# EAGLE board Wired_Mouse (EAGLE 9.6.0)
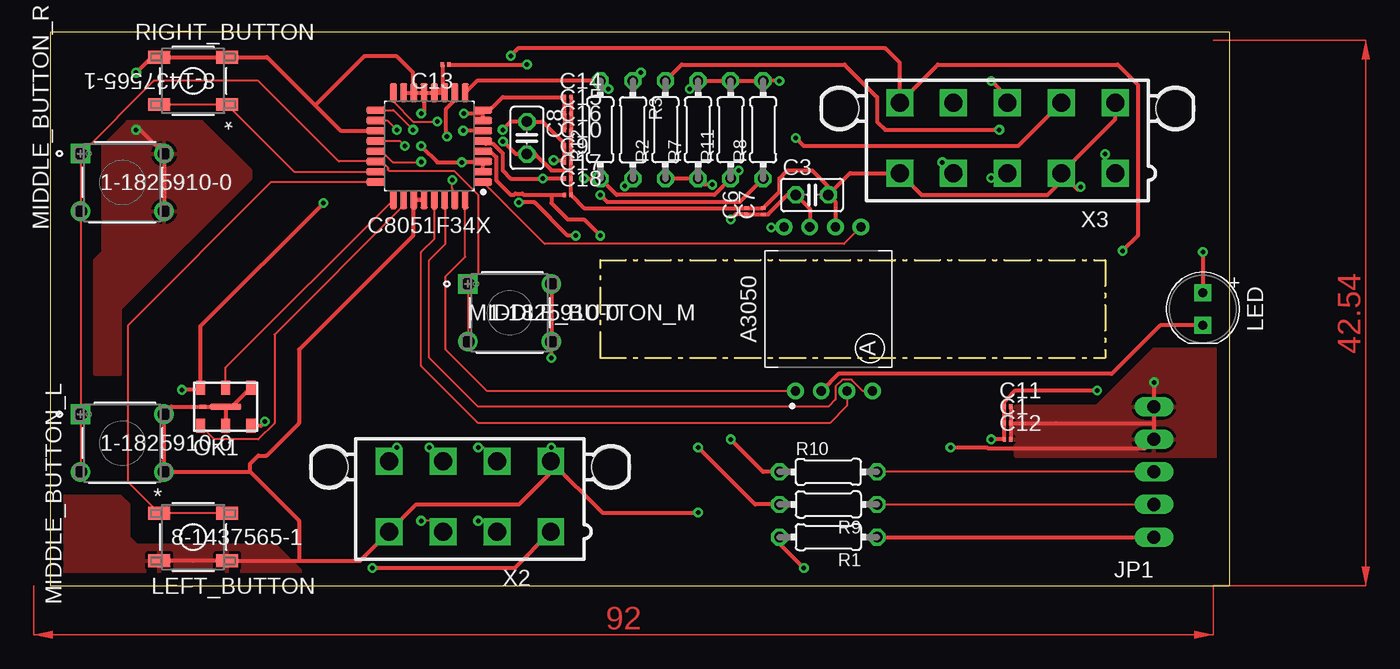
[diagram p0: board, top side]
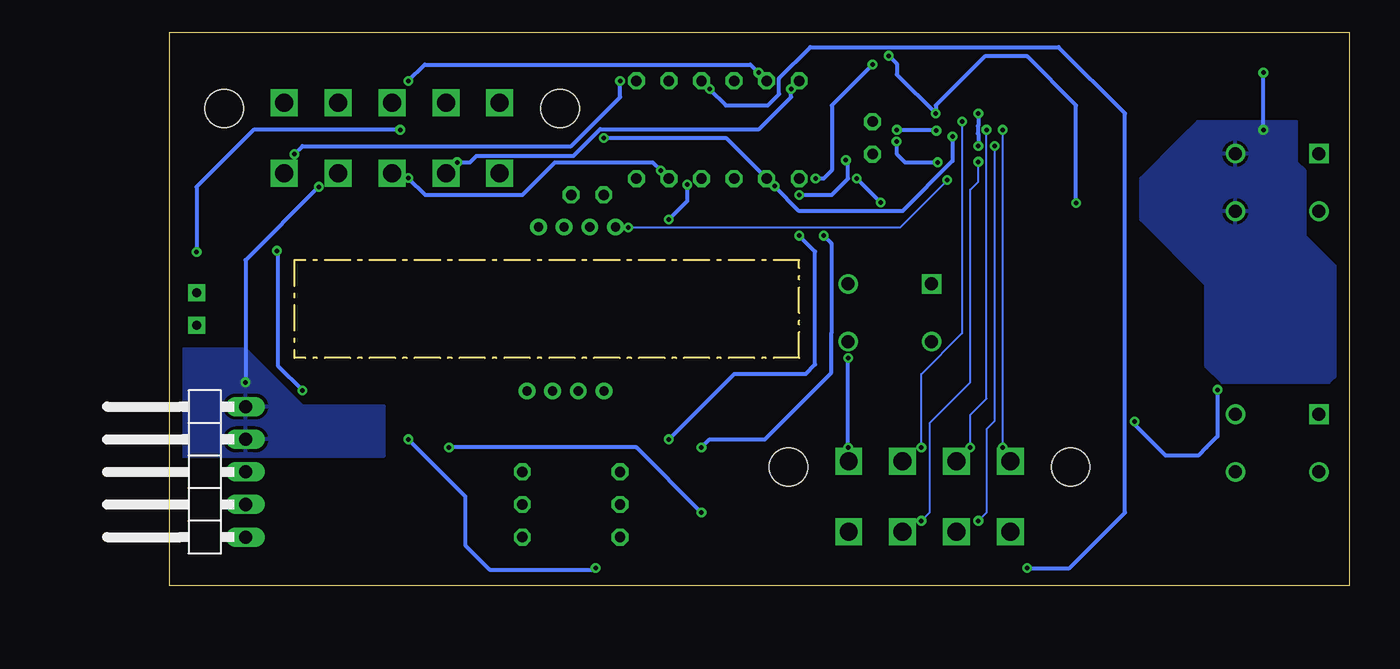
[diagram p1: board, bottom side, seen from below]

Size 92 x 43.17 mm. Coordinates in mm from the lower left corner, seen from the top.
Outline: 0,0 92,0 92,43.17 0,43.17 0,0
Outline: 42.91,17.78 42.91,25.4 82.28,25.4 82.28,17.78 42.91,17.78
Copper layers (1*16): Top 0.035mm / dielectric 1.5mm / Bottom 0.035mm
Design rules "default": minimum track width 6mil, minimum drill 0.35mm, track to track 6mil, track to pad 6mil, pad to pad 6mil, via to via 6mil, smd to smd 6mil, copper to edge 40mil, drill to drill 6mil, minimum pad ring 10mil, minimum via ring 8mil, stop-mask expansion 4mil, vias tented up to drill 0mil, thermal gap 10mil

## Footprints (pad centres in the part's own frame; a part is rotated, then mirrored left to right if it is on the bottom)
C0201 = smd 0.25 x 0.35: 1 -0.25,0; 2 0.25,0
C025-025X050 = drill 0.813 octagon: 1 -1.27,0; 2 1.27,0
1X05/90 = drill 1.016 long: 1 -5.08,-3.81; 2 -2.54,-3.81; 3 0,-3.81; 4 2.54,-3.81; 5 5.08,-3.81
SW4_1437565 = smd 1.702 x 0.991: 1 -2.642,1.85; 2 2.642,1.85; 3 -2.642,-1.85; 4 2.642,-1.85
SWITCH_1-1825910-0 = drill 1.016 pad 1.524 square: 1 -6.502,4.496 | drill 1.016 pad 1.524: 2 -6.502,0; 3 0,0; 4 0,4.496
AEDR-8300 = smd 0.72 x 1.08: 1 -1.96,-1.485; 2 0,-1.485; 3 1.96,-1.485; 4 1.96,1.485; 5 0,1.485; 6 -1.96,1.485 | smd 0.5 x 0.3: E1 -1.778,0 | smd 2.5 x 0.5: E2 0,0
0204/7 = drill 0.813 octagon: 1 -3.81,0; 2 3.81,0
DIP1279W50P200L985H450Q8B = drill 0.714 pad 1.314: 1 -6.395,2.55; 2 -6.395,0.55; 3 -6.395,-1.45; 4 -6.395,-3.45; 5 6.395,-2.55; 6 6.395,-0.55; 7 6.395,1.45; 8 6.395,3.45
QFP80P900X900X160-32N = smd 1.469 x 0.547: 1 -4.171,2.8; 2 -4.171,2; 3 -4.171,1.2; 4 -4.171,0.4; 5 -4.171,-0.4; 6 -4.171,-1.2; 7 -4.171,-2; 8 -4.171,-2.8; 17 4.171,-2.8; 18 4.171,-2; 19 4.171,-1.2; 20 4.171,-0.4; 21 4.171,0.4; 22 4.171,1.2; 23 4.171,2; 24 4.171,2.8 | smd 0.547 x 1.469: 9 -2.8,-4.171; 10 -2,-4.171; 11 -1.2,-4.171; 12 -0.4,-4.171; 13 0.4,-4.171; 14 1.2,-4.171; 15 2,-4.171; 16 2.8,-4.171; 25 2.8,4.171; 26 2,4.171; 27 1.2,4.171; 28 0.4,4.171; 29 -0.4,4.171; 30 -1.2,4.171; 31 -2,4.171; 32 -2.8,4.171
LEDRD254W50D500H871B = drill 0.7 pad 1.3 square: 1 -1.27,0; 2 1.27,0
5566-8 = drill 1.4 square: 1 6.3,-2.75; 2 2.1,-2.75; 3 -2.1,-2.75; 4 -6.3,-2.75; 5 6.3,2.75; 6 2.1,2.75; 7 -2.1,2.75; 8 -6.3,2.75 | hole 3: 11,2.29; -11,2.29
5566-10 = drill 1.4 square: 1 8.4,-2.75; 2 4.2,-2.75; 3 0,-2.75; 4 -4.2,-2.75; 5 -8.4,-2.75; 6 8.4,2.75; 7 4.2,2.75; 8 0,2.75; 9 -4.2,2.75; 10 -8.4,2.75 | hole 3: 13.1,2.29; -13.1,2.29

## Placement (x,y rotation side)
C1  [C0201]  74.66,12.7 0 top
C3  [C025-025X050]  59.42,30.48 0 top
C6  [C0201]  54.34,29.21 90 top
C7  [C0201]  55.61,29.21 90 top
C8  [C025-025X050]  37.2,34.92 270 top
C9  [C0201]  40.37,33.02 0 top
C10  [C0201]  40.37,34.29 0 top
C11  [C0201]  74.66,13.97 0 top
C12  [C0201]  74.66,11.43 0 top
C13  [C0201]  30.84,40.64 180 top
C14  [C0201]  40.37,38.1 0 top
C15  [C0201]  40.37,36.83 0 top
C16  [C0201]  40.37,35.56 0 top
C17  [C0201]  40.37,31.75 0 top
C18  [C0201]  40.37,30.48 0 top
JP1  [1X05/90]  89.9,8.89 90 bottom
LEFT_BUTTON  8-1437565-1  [SW4_1437565]  11.16,3.81 0 top
MIDDLE_BUTTON_L  1-1825910-0  [SWITCH_1-1825910-0]  8.89,8.89 0 top
MIDDLE_BUTTON_M  1-1825910-0  [SWITCH_1-1825910-0]  39.1,19.05 0 top
MIDDLE_BUTTON_R  1-1825910-0  [SWITCH_1-1825910-0]  8.89,29.21 0 top
OK1  AEDR-8300-K/P/Q  [AEDR-8300]  13.7,13.97 0 top
R1  [0204/7]  60.69,3.81 180 top
R2  [0204/7]  47.99,35.56 90 top
R3  [0204/7]  45.45,35.56 270 top
R7  [0204/7]  50.53,35.56 90 top
R8  [0204/7]  55.61,35.56 90 top
R9  [0204/7]  60.69,6.35 180 top
R10  [0204/7]  60.69,8.89 0 top
R11  [0204/7]  53.07,35.56 90 top
R12  [0204/7]  42.91,35.56 90 top
RIGHT_BUTTON  8-1437565-1  [SW4_1437565]  11.16,39.37 180 top
U$1  ADNS_3050THROUGH_HOLE  [DIP1279W50P200L985H450Q8B]  60.69,21.59 90 top
U$2  C8051F34XSURFACE-MOUNT  [QFP80P900X900X160-32N]  29.57,34.29 180 top
U$3  HLMP-EGXX_LEDTHROUGH_HOLE  [LEDRD254W50D500H871B]  89.9,21.59 270 top
X2  5566-8  [5566-8]  32.75,6.99 0 top
X3  5566-10  [5566-10]  74.66,34.92 0 top

## Library data of the parts
C1 C3 C6-C18 = rcl; SPICEPREFIX: C
JP1 = pinhead; SPICEPREFIX: X
LEFT_BUTTON RIGHT_BUTTON = Switches; BUILT_BY: EMA_UL_Team; CATEGORY: Tactile Switches; CONFIGURATION__POLE-THROW_: Single Pole - Single Throw; COPYRIGHT: Copyright (C) 2016 Accelerated Designs. All rights reserved; DESCRIPTION: FSMCTATR=TACTILE SWITCH T&R; MANUFACTURER_PART_NUMBER: 8-1437565-1; MAX_SWITCHING_CURRENT: -; MAX_SWITCHING_VOLTAGE_AC_: -; PART_STATUS: active; PRODUCT_TYPE: Switch; SERIES: Unknown; SWITCH_TYPE: Tactile Switches; TE_PART_NUMBER: 8-1437565-1; VENDOR: TE Connectivity
MIDDLE_BUTTON_L MIDDLE_BUTTON_M MIDDLE_BUTTON_R = Switches; BUILT_BY: EMA_UL_Team; CATEGORY: Tactile Switches; COPYRIGHT: Copyright (C) 2016 Accelerated Designs. All rights reserved; DESCRIPTION: FSM6JH=6MM TACT SWITCH, HIGH TEMP; MANUFACTURER_PART_NUMBER: 1-1825910-0; PART_STATUS: active; SERIES: Unknown; VENDOR: TE Connectivity
OK1 = optocoupler; MF: AGILENT TECHNOLOGIES; MPN: AEDR-8300-1P2; OC_FARNELL: 1161102; OC_NEWARK: 08J1020; SPICEPREFIX: X
R1-R3 R7-R12 = rcl; SPICEPREFIX: R
U$1 U$2 = Custom_Mouse; SPICEPREFIX: X
U$3 = Custom_Mouse; SPICEPREFIX: B
X2 X3 = con-molex; MF: MOLEX; OC_FARNELL: unknown; OC_NEWARK: unknown; SPICEPREFIX: X

## Nets
5V: JP1.1 R1.1
+3V3: R7.2 R8.2 R11.2 X2.1 X3.1
+5V: C1.1 C11.1 C12.1 C14.1 C15.1 C16.1 OK1.3 OK1.6 R1.2 U$2.7 U$2.8 X3.10
+CPI: U$2.21 X2.2
-CPI: U$2.20 X2.3
GND: C1.2 C3.2 C6.2 C7.2 C8.2 C9.2 C10.2 C11.2 C12.2 C13.2 C14.2 C15.2 C16.2 C17.2 C18.2 JP1.4 JP1.5 LEFT_BUTTON.3 LEFT_BUTTON.4 MIDDLE_BUTTON_L.3 MIDDLE_BUTTON_L.4 MIDDLE_BUTTON_M.3 MIDDLE_BUTTON_M.4 MIDDLE_BUTTON_R.3 MIDDLE_BUTTON_R.4 OK1.2 OK1.4 OK1.E1 OK1.E2 RIGHT_BUTTON.3 RIGHT_BUTTON.4 U$1.6 U$2.2 U$2.3 U$2.11 U$2.12 U$2.13 U$2.14 U$2.15 U$2.19 U$2.27 U$2.28 X2.4 X2.5 X3.2 X3.5 X3.6
LED1: U$2.18 X2.8
LED2: U$2.17 X2.7
LED3: U$2.16 X2.6
N$1: U$1.5 U$2.1
N$2: U$1.1 U$2.32
N$3: U$1.8 U$2.31
N$4: U$1.4 U$2.30
N$5: U$1.3 U$2.29
N$6: C8.1 C9.1 C10.1 R8.1 U$2.6
N$7: R2.2 U$3.1
N$8: U$1.2 U$3.2
N$10: C3.1 C6.1 C7.1 R2.1 R7.1 U$1.7
N$11: LEFT_BUTTON.1 LEFT_BUTTON.2 U$2.24
N$12: RIGHT_BUTTON.1 RIGHT_BUTTON.2 U$2.23
N$15: JP1.2 R9.1
N$16: MIDDLE_BUTTON_L.1 MIDDLE_BUTTON_L.2 MIDDLE_BUTTON_M.1 MIDDLE_BUTTON_M.2 MIDDLE_BUTTON_R.1 MIDDLE_BUTTON_R.2 U$2.22
N$17: JP1.3 R10.2
N$18: C17.1 R9.2 U$2.5
N$19: C18.1 R10.1 U$2.4
N$20: R3.1 X3.8
N$21: R3.2 U$2.10 X3.7
N$23: R12.2 U$2.9 X3.4
N$24: C13.1 R11.1 R12.1 X3.3
ZA: OK1.5 U$2.25
ZB: OK1.1 U$2.26

## Tracks (layer width: path | path; a pad name or v marks a point on that pad's centre or on a via)
5V
  Top 0.305: R1.1 JP1.1
+3V3  (via drill 0.35)
  Top 0.305: X3.1 82.28,32.95 v82.28,33.66 | v56.88,39.37 R8.2 R11.2 R7.2 v49.89,38.73 | X2.1 36.21,1.39 v25.13,1.39
  Bottom 0.305: v82.28,33.66 81.65,34.29 60.69,34.29 56.88,38.1 v56.88,39.37 | v25.13,1.39 21.83,1.39 17.51,5.71 17.51,36.83 22.69,42.01 42.05,42.01 44.48,39.57 44.48,38.34 45.35,37.47 48.62,37.47 v49.89,38.73
+5V  (via drill 0.35)
  Top 0.305: C16.1 C15.1 C14.1 35.29,38.1 34.28,37.09 U$2.8 33.75,36.83 | 33.75,36.83 U$2.7 | v32.26,36.83 33.75,36.83 | v21.32,29.84 11.74,20.27 OK1.6 11.91,15.29 v10.29,15.29 | v81.65,15.24 77.84,15.24 75.3,15.24 74.66,14.61 74.41,14.36 C11.1 C1.1 C12.1 v73.39,11.43 | v83.64,26.12 84.82,27.3 84.82,39.08 83.26,40.64 69.23,40.64 X3.10 66.26,40.78 65.14,41.91 36.51,41.91 v35.92,41.32 | v58.78,1.39 56.88,3.3 R1.2 | v16.76,12.81 16.44,12.48 OK1.3
  Bottom 0.305: v21.32,29.84 21.32,37.47 25.13,41.27 28.45,41.27 31.55,38.17 32.26,37.47 v32.26,36.83 35.29,39.86 35.29,40.69 v35.92,41.32 | v81.65,15.24 83.53,17.12 83.53,25.92 83.64,26.03 v83.64,26.12 | v73.39,11.43 68.95,6.99 68.95,3.17 67.04,1.27 58.78,1.27 v58.78,1.39 | v10.29,15.29 10.29,11.67 11.16,10.79 11.79,10.16 14.34,10.16 16.76,12.59 v16.76,12.81
+CPI  (via drill 0.35)
  Top 0.152: X2.2 34,5.08 v33.38,5.08 | U$2.21 25.87,33.89 26.72,33.04 28.92,33.04 v28.94,33.06
  Bottom 0.152: v33.38,5.08 32.75,5.71 32.75,12.7 29.57,15.88 29.57,30.89 28.94,31.53 v28.94,33.06
-CPI  (via drill 0.35)
  Top 0.152: U$2.20 27.27,34.69 v27.67,34.29 | X2.3 29.8,5.08 v28.94,5.08
  Bottom 0.152: v28.94,5.08 28.3,5.71 28.3,12.21 27.67,12.84 v27.67,34.29
GND  (via drill 0.35)
  Top 0.305: RIGHT_BUTTON.4 8.62,41.22 | 8.62,41.22 RIGHT_BUTTON.3 16.93,41.22 20.68,37.47 | MIDDLE_BUTTON_R.3 MIDDLE_BUTTON_R.4 7.04,35.56 v6.71,35.56 | LEFT_BUTTON.3 11.16,1.96 LEFT_BUTTON.4 19.41,1.96 | MIDDLE_BUTTON_M.4 MIDDLE_BUTTON_M.3 v39.1,17.78 | OK1.E2 OK1.E1 9.47,13.97 MIDDLE_BUTTON_L.4 MIDDLE_BUTTON_L.3 15.61,8.89 | OK1.4 14.18,13.97 OK1.E2 | OK1.E2 OK1.2 | U$2.2 U$2.3 33.68,33.02 v32.11,33.02 30.21,33.02 v28.94,34.29 | U$2.15 U$2.14 | U$2.14 U$2.13 | U$2.13 U$2.12 30.21,38.46 | 30.21,38.46 U$2.11 | U$2.27 28.94,30.12 U$2.28 28.54,30.12 28.3,29.88 28.3,27.3 19.41,18.41 19.41,12.7 16.88,10.16 16.24,10.16 15.61,9.53 15.61,8.89 | C3.2 61.24,29.93 U$1.6 | C14.2 C15.2 C16.2 C10.2 C9.2 40.62,32.38 | 40.62,32.38 C17.2 C18.2 41.64,29.46 C6.2 C7.2 56.88,30.73 56.88,31.75 57.51,32.38 59.42,32.38 60.69,31.11 C3.2 | C13.2 30.59,38.85 30.21,38.46 | X2.5 39.05,8.84 36.56,6.35 28.57,6.35 X2.4 24.18,1.96 19.41,1.96 | U$2.19 22.66,35.49 20.68,37.47 | 15.61,8.89 19.41,5.08 19.41,1.96 | X2.5 39.05,10.74 v39.1,10.79 | 86.09,12.7 JP1.5 v86.09,15.88 | 86.09,12.7 JP1.4 85.41,10.75 73.11,10.75 73.06,10.79 v70.22,10.79 | C11.2 C1.2 | C1.2 C12.2 | C1.2 78.47,12.7 86.09,12.7 | X3.2 83.06,36.38 X3.6 | C3.2 62.38,32.17 X3.5 67.95,30.48 77.8,30.48 78.77,31.45 78.77,32.09 X3.2 | v80.38,31.11 80.15,30.89 X3.2 | U$2.14 28.3,38.53 28.3,40.01 27.04,41.27 24.5,41.27 20.68,37.47 | v35.33,34.65 36.32,33.66 C8.2 37.83,33.66 39.1,32.38 40.62,32.38 | X2.5 43.07,5.71 v50.53,5.71 | v6.71,40.01 7.93,41.22 8.62,41.22 | U$2.13 29.18,37.06 v28.94,36.83
  Bottom 0.305: v39.1,10.79 v39.1,17.78 | v80.38,31.11 86.09,25.4 v86.09,15.88 | v35.33,34.65 35.33,33.69 34.65,33.02 v32.11,33.02 | v50.53,5.71 55.61,10.79 v70.22,10.79 | v6.71,35.56 v6.71,40.01 | v28.94,36.83 28.94,35.89 28.99,35.84 28.99,35.28 28.94,35.23 v28.94,34.29
  pour Top: 91.81,10.16 91.81,18.41 86.09,18.41 81.65,13.97 75.3,13.97 75.3,10.16
  pour Bottom: 91.81,10.16 75.3,10.16 75.3,13.97 81.01,13.97 81.65,13.97 86.09,18.41 91.81,18.41
  pour Top: 21.32,0 -0.27,0 -0.27,6.99 5.45,6.99 6.08,6.35 6.08,3.81 6.71,3.17 17.51,3.17 20.05,0.64 21.32,0.64
  pour Bottom: 7.35,36.2 5.45,36.2 4.18,36.2 4.18,33.02 3.54,32.38 3.54,31.11 3.54,27.3 1,24.77 1,16.51 1.64,15.88 9.89,15.88 11.16,17.14 11.16,23.5 16.24,28.57 16.24,31.11 16.24,31.75 13.07,34.92 11.79,36.2
  pour Top: 6.08,36.2 11.79,36.2 15.61,32.38 15.61,31.75 5.45,21.59 5.45,16.51 3.54,16.51 3.54,25.4 4.18,26.04 4.18,34.29
LED1  (via drill 0.35)
  Top 0.152: U$2.18 26.3,36.29 v27.04,35.56 | v27.04,10.79 27.04,10.32 X2.8
  Bottom 0.152: v27.04,10.79 v27.04,35.56
LED2  (via drill 0.35)
  Top 0.152: U$2.17 26.78,37.09 v28.3,35.56 | X2.7 29.59,10.79 v29.57,10.79
  Bottom 0.152: v28.3,35.56 28.3,14.61 29.57,13.34 v29.57,10.79
LED3  (via drill 0.35)
  Top 0.152: X2.6 33.79,10.79 v33.38,10.79 | U$2.16 26.78,37.73 28.3,36.2 v30.21,36.2
  Bottom 0.152: v33.38,10.79 33.38,16.51 30.21,19.68 v30.21,36.2
N$1
  Top 0.152: U$1.5 61.92,26.67 38.57,26.67 U$2.1
N$2
  Top 0.152: U$1.1 34.06,15.2 30.84,18.41 30.84,24.13 32.38,25.66 U$2.32
N$3  (via drill 0.35)
  Top 0.152: U$2.31 31.6,30.46 31.37,31 v31.37,31.64 | v56.24,27.94 57.2,27.94 U$1.8
  Bottom 0.152: v31.37,31.64 35.07,27.94 v56.24,27.94
N$4
  Top 0.152: U$1.4 63.39,15.2 62.51,16.08 61.77,16.08 61.25,15.56 61.25,14.53 60.69,13.97 33.38,13.97 29.57,17.78 29.57,25.4 30.84,26.67 30.84,30.05 U$2.30
N$5
  Top 0.152: U$1.3 62.14,14.04 60.8,12.7 33.38,12.7 28.94,17.14 28.94,26.04 29.98,27.07 U$2.29
N$6  (via drill 0.35)
  Top 0.305: U$2.6 v32.22,35.49 | v35.29,35.56 35.92,36.2 C8.1 38.39,36.2 40.12,34.47 C10.1 40.12,33.66 C9.1 39.95,33.19 v39.26,33.19 | R8.1 53.78,29.92 43.47,29.92 v42.91,30.48
  Bottom 0.305: v32.22,35.49 32.15,35.56 v35.29,35.56 | v42.91,30.48 40.37,30.48 39.1,31.75 39.1,33.02 v39.26,33.19
N$7  (via drill 0.35)
  Top 0.305: R2.2 49.26,40.64 61.96,40.64 64.5,38.1 64.5,36.2 65.14,35.56 v74.03,35.56 | v89.9,26.04 U$3.1
  Bottom 0.305: v74.03,35.56 85.45,35.56 89.9,31.11 v89.9,26.04
N$8
  Top 0.305: U$1.2 61.48,16.54 82.8,16.54 86.58,20.32 U$3.2
N$10  (via drill 0.35)
  Top 0.305: R2.1 R7.1 51,31.28 v51.63,31.28 | U$1.7 59.24,29.39 C3.1 57.51,30.48 55.99,28.96 C7.1 C6.1 53.45,28.96 v53.07,28.57
  Bottom 0.305: v53.07,28.57 51.63,30.01 v51.63,31.28
N$11
  Top 0.152: LEFT_BUTTON.2 LEFT_BUTTON.1 6.08,8.1 6.08,20.32 17.25,31.49 U$2.24
N$12
  Top 0.152: RIGHT_BUTTON.2 RIGHT_BUTTON.1 19.03,32.29 U$2.23
N$15
  Top 0.152: R9.1 JP1.2
N$16
  Top 0.152: MIDDLE_BUTTON_R.1 2.39,33.66 | 2.39,33.66 MIDDLE_BUTTON_R.2 MIDDLE_BUTTON_L.1 MIDDLE_BUTTON_L.2 | MIDDLE_BUTTON_M.2 MIDDLE_BUTTON_M.1 33.38,24.33 33.38,30.48 31.51,32.36 26.43,32.36 26.37,32.42 | 2.39,33.66 8.1,39.37 16.24,39.37 22.52,33.09 U$2.22 25.87,33.09 26.37,32.59 | 26.37,32.59 26.37,32.42 | 26.37,32.42 26.37,32.59
N$17
  Top 0.152: JP1.3 R10.2
N$18  (via drill 0.35)
  Top 0.305: C17.1 v38.42,31.75 35.92,31.75 35.29,32.38 35.29,33.72 34.69,34.32 | R9.2 54.97,6.35 v50.53,10.79 | v41,27.3 40.37,27.3 37.78,29.89 v36.56,29.89 | 34.54,34.47 34.69,34.32 | 34.69,34.32 34.54,34.47 | 34.54,34.47 33.97,34.47 U$2.5
  Bottom 0.305: v50.53,10.79 49.89,11.43 45.59,11.43 40.39,16.63 40.39,19.68 40.39,26.7 v41,27.3 | v38.42,31.75 v36.56,29.89
N$19  (via drill 0.35)
  Top 0.305: U$2.4 34.32,33.89 34.79,33.43 34.79,31.62 35.92,30.48 36.18,30.48 36.28,30.58 36.84,30.58 36.94,30.48 39.1,30.48 | 39.1,30.48 C18.1 | 39.1,30.48 39.1,29.84 40.37,28.57 41.64,28.57 v42.91,27.3 | R10.1 55.61,8.89 v53.07,11.43
  Bottom 0.305: v53.07,11.43 47.96,16.54 42.39,16.54 41.66,17.26 41.66,26.06 v42.91,27.3
N$20  (via drill 0.35)
  Top 0.305: v73.39,39.37 74.66,38.1 X3.8 | v46.08,40.01 R3.1
  Bottom 0.305: v73.39,39.37 72.12,40.64 46.72,40.64 v46.08,40.01
N$21  (via drill 0.35)
  Top 0.305: v30.96,35.04 30.89,34.97 30.89,37.2 31.57,37.89 U$2.10 | v44.81,31.16 45.4,31.75 R3.2 | X3.7 75.48,34.29 58.78,34.29 v58.15,34.92
  Bottom 0.305: v30.96,35.04 30.96,33.13 34.88,29.21 42.91,29.21 44.81,31.11 | 44.81,31.11 v44.81,31.16 | v58.15,34.92 48.62,34.92 44.81,31.11
N$23  (via drill 0.35)
  Top 0.305: U$2.9 33.28,39.37 R12.2 v43.54,38.73 | X3.4 69.62,33.02 v69.58,33.02
  Bottom 0.305: v69.58,33.02 68.58,33.02 68.07,33.53 60.51,33.53 58.43,35.61 46.04,35.61 43.54,38.1 v43.54,38.73
N$24  (via drill 0.35)
  Top 0.305: X3.3 74.28,31.8 v73.39,31.8 | v53.7,32.38 R11.1 51.8,30.48 44.18,30.48 R12.1 v41.64,31.75 | C13.1 v37.2,40.64
  Bottom 0.305: v73.39,31.8 72.07,30.48 64.5,30.48 61.96,33.02 54.34,33.02 v53.7,32.38 | v37.2,40.64 40.37,37.47 40.37,32.38 41,31.75 v41.64,31.75
ZA
  Top 0.152: OK1.5 13.7,17.04 U$2.25
ZB
  Top 0.152: U$2.26 27.57,29.52 27.51,29.59 17.51,19.59 17.51,12.7 16.24,11.43 12.79,11.43 OK1.1
(copper drawn outside any net)
  shapes: Top area x2